# Altium PCB EsoCore_Edge.PcbDoc (part 3 of 6)
Units mil, origin at the board's own origin, x right, y up, seen from the top; angles counter-clockwise.
Board outline 6732.28 x 3385.83 mil, 4 copper layers (Top Layer, Layer 1, Layer 2, Bottom Layer), stack 61.58 mil thick; 330 components, 239 nets, 1236 pads, 712 vias.
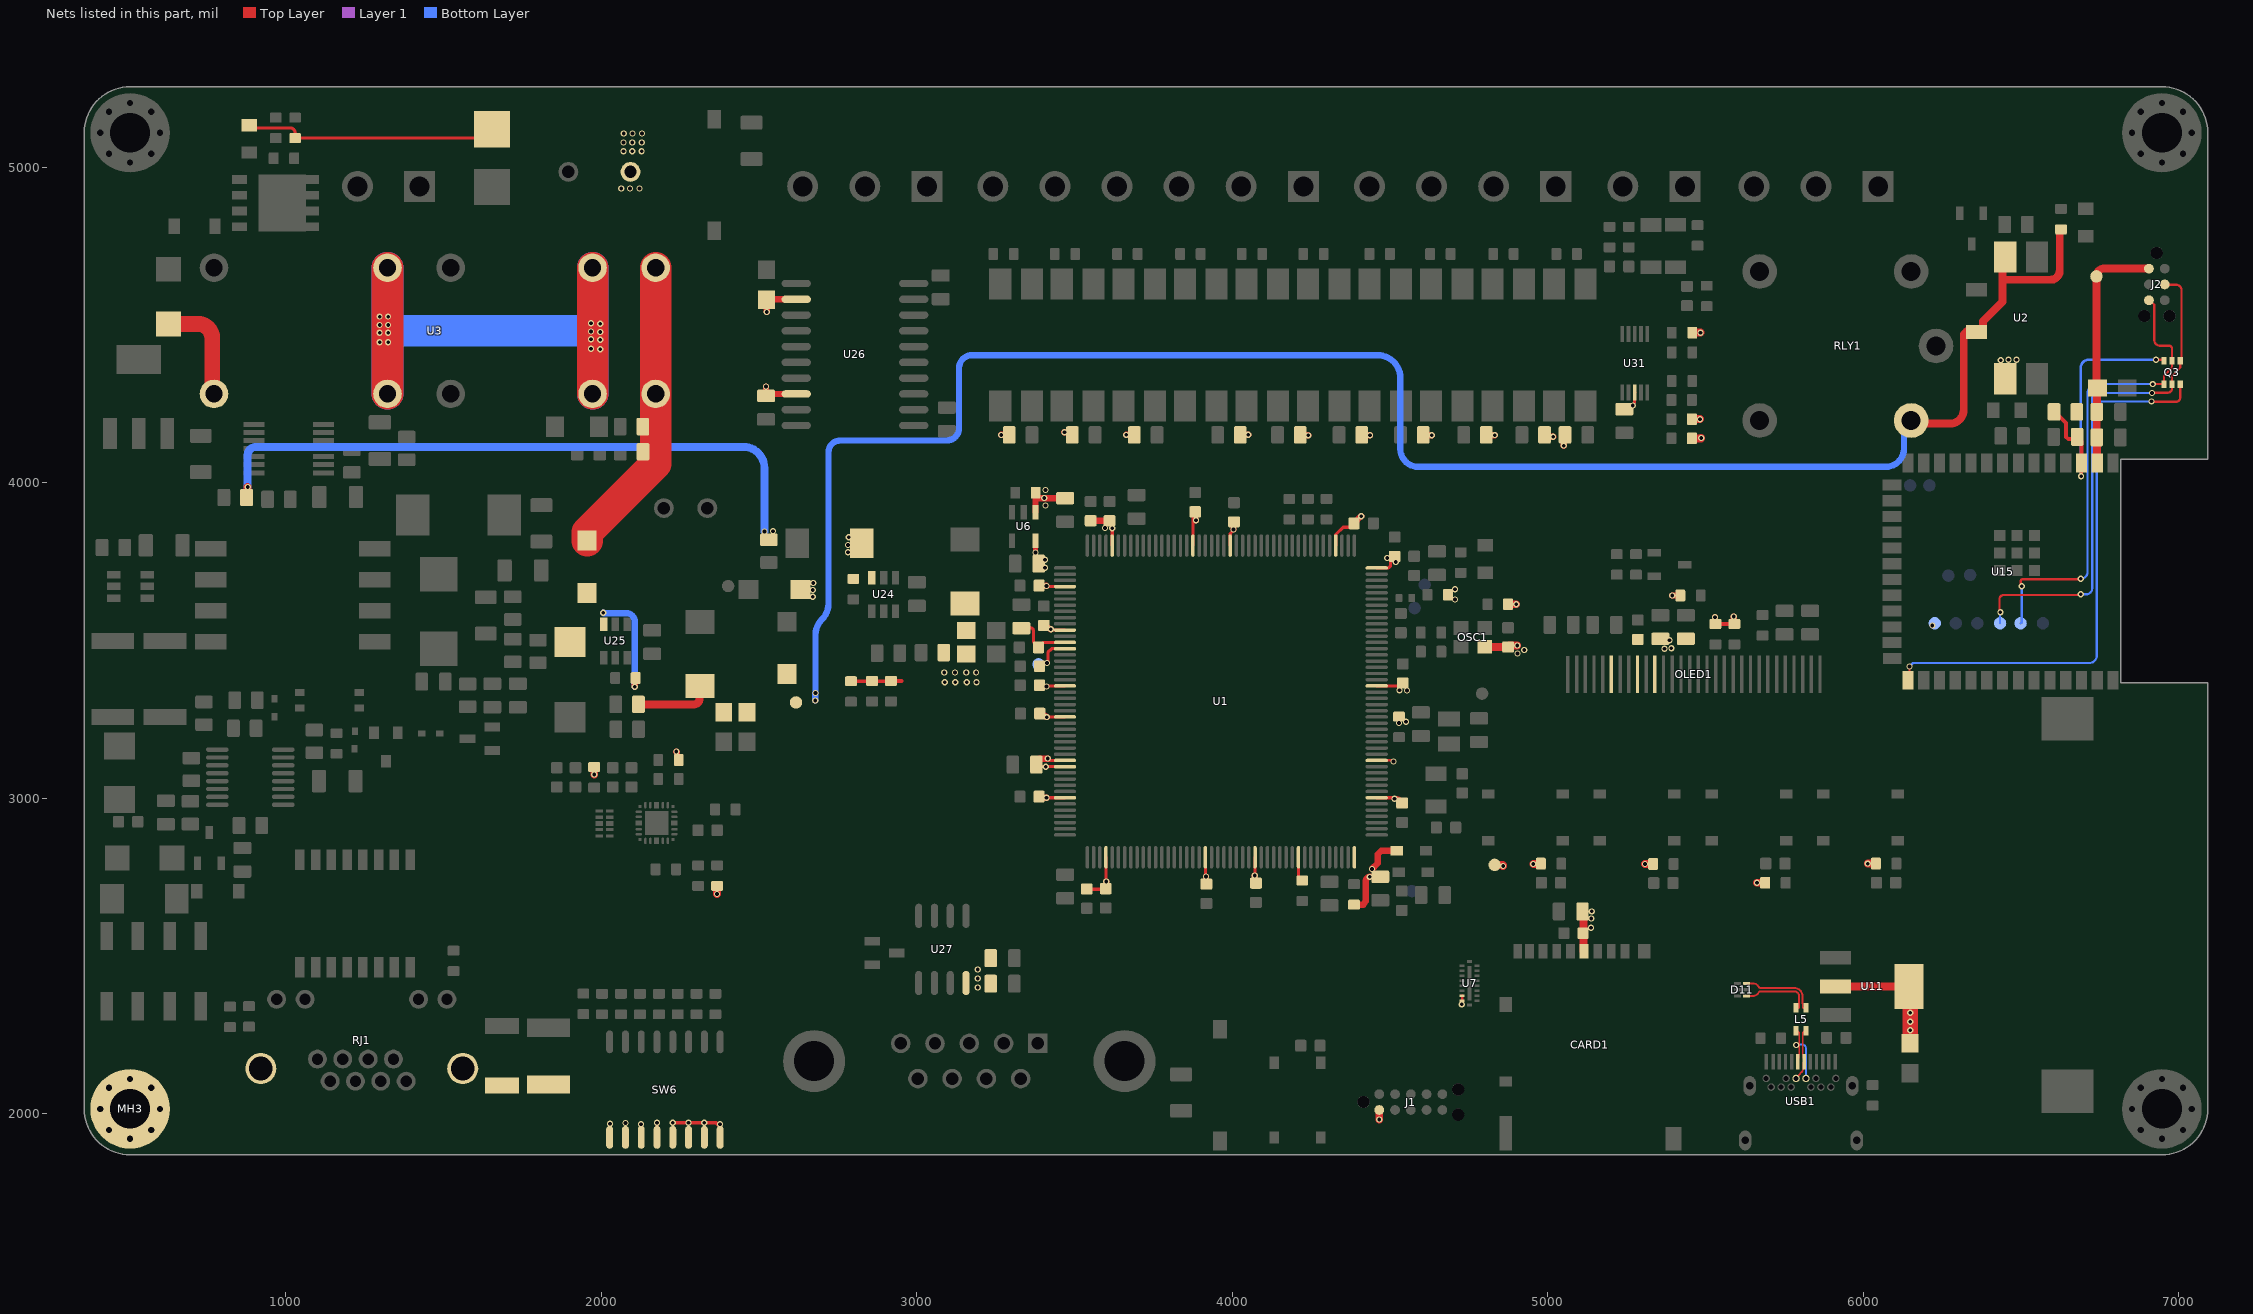
[diagram p4: the nets of this part, all layers, seen from the top]

## Part data (continued)
SW7 SW8: library part DSIC01LS-P_C600988, Color=Black, Current Rating=25mA, JLCPCB Part Class="Extended Part", LCSC Part Name="平拨,凸起式 1位拨码开关", Manufacturer="XKB Connection(中国星坤)", Operating Life="3,000 Cycles", Operating Temperature=-20℃~+70℃, Voltage Rating=24V, Add into BOM=yes, Circuit=SPST, Convert to PCB=yes, Datasheet=https://item.szlcsc.com/datasheet/DSIC01LS-P/631008.html, Device=DSIC01LS-P_C600988, Lead Pitch=-, Manufacturer Part=DSIC01LS-P, Number of Positions=1, Supplier=LCSC, Supplier Footprint=SMD,6.2x3.5mm, Supplier Part=C600988, Symbol=DSIC01LS-P_C600988, Termination Style="Gull Wing", Type="Slide, Rocked"
T2: "253ÂµH Isolation and Data Interface (Encapsulated) Pulse Transformer 1:0.125:0.208 Surface Mount", Package=None, Check_prices=https://www.snapeda.com/parts/PA1134NL/Pulse/view-part/?ref=eda, MF=Pulse, MP=PA1134NL, SnapEDA_Link=https://www.snapeda.com/parts/PA1134NL/Pulse/view-part/?ref=snap
T3: library part H1102NLT_C20623173, Inductor=-, JLCPCB Part Class="Extended Part", Manufacturer=DEXU(德旭电子), Operating Temperature=0℃~+70℃, Add into BOM=yes, Convert to PCB=yes, Datasheet=https://atta.szlcsc.com/upload/public/pdf/source/20240221/C17B427D958C9B2A67A52A591C4EE00A.pdf, Device=H1102NLT_C20623173, Function=-, HI-POT=-, LCSC Part Name=H1102NLT, Manufacturer Part=H1102NLT, port=单口, rate=10/100M, Supplier=LCSC, Supplier Footprint=SMD-16P,12.7x9.5mm, Supplier Part=C20623173, Symbol=H1102NLT_C20623173, Turns Ratio=-
U1: JLCPCB Part Class="Extended Part", LCSC Part Name="带DSP和DP-FPU的高性能ARM Cortex-M7 + Cortex-M4 MCU，具有2 MB Flash、1 MB RAM、480 MHz CPU、ART加速器、一级缓存、外部存储器接口、大量外设、SMPS和MIPI-DSI", Low Voltage Detection Threshold=1.62V~3.6V, Manufacturer=ST(意法半导体), ADC (Bit)=16bit, Add into BOM=yes, Application Area=-, Convert to PCB=yes, CPU Core="ARM other series", CPU Maximum Speed=240MHz；480MHz, DAC (Bit)=12bit, Datasheet=https://atta.szlcsc.com/upload/public/pdf/source/20200902/C730194_AB31659919554024C167BACD3EB6D7B7.pdf, Device=STM32H747IIT6, Manufacturer Part=STM32H747IIT6, Number of I/O=168, Program Memory Type=FLASH, Program Storage Size=2MB, Supplier=LCSC, Supplier Footprint=LQFP-176(24x24), Supplier Part=C730199, Symbol=STM32H747IIT6
U2 U28 U29 U30 U32 U33 U34 U35 U36 U37 U38: JLCPCB Part Class="Extended Part", Manufacturer=SHARP(夏普), Contributor=LCSC, Manufacturer Part=PC817X2NIPW, spicePre=U, spiceSymbolName=PC817X2NIPW, Supplier=LCSC, Supplier Part=C2840443
U3: Coil Resistance=-, JLCPCB Part Class="Extended Part", Manufacturer=OMRON(欧姆龙), Add into BOM=yes, Coil Type=-, Coil Voltage=-, Contact Form=-, Contact Material=-, Contact Rating=-, Contact Resistance=-, Convert to PCB=yes, Datasheet=https://item.szlcsc.com/datasheet/G7SA-2A2B%2520DC24/378713.html, Device="G7SA-2A2B DC24", LCSC Part Name="G7SA-2A2B DC24", Manufacturer Part="G7SA-2A2B DC24", Number of Pins=-, Operate Time=-, Operating Temperature=-, Release Time=-, Supplier=LCSC, Supplier Footprint=DIP,13x40mm, Supplier Part=C397126, Switching Current(Max)=-, Switching Voltage(Max)=-, Symbol="G7SA-2A2B DC24"
U4: JLCPCB Part Class="Extended Part", LCSC Part Name="330mA 15V电机驱动芯片", Manufacturer=TI(德州仪器), Add into BOM=yes, Convert to PCB=yes, Datasheet=https://www.ti.com/cn/lit/gpn/drv110, Device=DRV110APWR, Manufacturer Part=DRV110APWR, Supplier=LCSC, Supplier Footprint=TSSOP-14, Supplier Part=C2653796, Symbol=DRV110APWR
U5: library part BLM18PG121SN1D, Current Rating=2A, DC Resistance=50mΩ, Impedance @ Frequency=120Ω@100MHz, JLCPCB Part Class="Extended Part", Manufacturer=muRata(村田), Tolerance=±25%, Add into BOM=yes, Circuits=1, Convert to PCB=yes, Datasheet=https://atta.szlcsc.com/upload/public/pdf/source/20130704/1457706621134.pdf, Device=BLM18PG121SN1D, Manufacturer Part=BLM18PG121SN1D, Supplier=LCSC, Supplier Footprint=0603, Supplier Part=C14709, Symbol=BLM18PG121SN1D_C14709
U6: Dropout Voltage=380mV@(300mA), JLCPCB Part Class="Extended Part", LCSC Part Name="具有使能功能的 300mA、高 PSRR、低 IQ、低压降稳压器", Manufacturer=TI(德州仪器), Maximum Input Voltage=5.5V, Operating Temperature=-40℃~+125℃@(Tj), Output Current=300mA, Output Voltage=1.2V, Power Supply Rejection Ratio (PSRR)=68dB@(1kHz), standby current=55uA, Add into BOM=yes, Convert to PCB=yes, Datasheet=https://www.ti.com/cn/lit/gpn/tlv702, Device=TLV70212DBVR, Feature="ESD Protection；Low ESR；Thermal Protection(TSD)；Under-voltage Lockout；Overcurrent Protection(OCP)；With ability", Manufacturer Part=TLV70212DBVR, Number of Outputs=1, Output Polarity="Positive electrode", Output Type=Fixed, Supplier=LCSC, Supplier Footprint=SOT-23-5, Supplier Part=C81462, Symbol=TLV70212DBVR
U7: JLCPCB Part Class="Extended Part", Manufacturer=ST(意法半导体), Add into BOM=yes, Convert to PCB=yes, Datasheet=https://atta.szlcsc.com/upload/public/pdf/source/20230906/AB780163D3E87C06B3836FCBE42EA0F7.pdf, Device=EMIF06-MSD02N16, LCSC Part Name=EMIF06-MSD02N16, Manufacturer Part=EMIF06-MSD02N16, Supplier=LCSC, Supplier Footprint=QFN-16L, Supplier Part=C5267594, Symbol="EMIF06-MSD02N 16"
U8 U9 U10: Current - Rectified=2A, JLCPCB Part Class="Extended Part", LCSC Part Name="电压:40V 电流:2A", Manufacturer=Comchip(典琦), Non-Repetitive Peak Forward Surge Current=70A, Operating Junction Temperature Range=-55℃~+100℃, Reverse Leakage Current (Ir)=200uA@40V, Voltage - DC Reverse(Vr)=40V, Voltage - Forward(Vf@If)=310mV@2A, Add into BOM=yes, Convert to PCB=yes, Datasheet=https://item.szlcsc.com/datasheet/CDBA240LL-HF/3097132.html, Device=CDBA240LL-HF, Manufacturer Part=CDBA240LL-HF, Supplier=LCSC, Supplier Footprint=SMA(DO-214AC), Supplier Part=C2886093, Symbol=CDBA240LL-HF
U11: library part AMS1117-3.3_C6186, JLCPCB Part Class="Basic Part", LCSC Part Name="输出3.3V 1A", Manufacturer=AMS, Operating Temperature=-40℃~+125℃, Output Current=1A, Output Voltage=3.3V, Power Supply Rejection Ratio (PSRR)=72dB@(120Hz), standby current=5mA, Voltage - Supply=16V, Voltage Dropout=1.1V@(800mA), Add into BOM=yes, Convert to PCB=yes, Datasheet=https://item.szlcsc.com/datasheet/AMS1117-3.3/6652.html, Device=AMS1117-3.3_C6186, Features="Over Current Protection；Over Temperature Protection", Manufacturer Part=AMS1117-3.3, Noise=-, Number of Outputs=1, Output Configuration=Positive, Output Type=Fixed, Supplier=LCSC, Supplier Footprint=SOT-223, Supplier Part=C6186, Symbol=AMS1117-3.3
U12: Breaking Capacity=50A, Current Rating=5A, JLCPCB Part Class="Extended Part", LCSC Part Name=125V贴片式保险丝, Manufacturer=Littelfuse(美国力特), Operating Temperature=-55℃~+125℃, Voltage Rating  (AC)=125V, Add into BOM=yes, Convert to PCB=yes, Datasheet=https://atta.szlcsc.com/upload/public/pdf/source/20171201/C151124_15121178420491156381.pdf, Device=0452005.MRL, Manufacturer Part=0452005.MRL, Supplier=LCSC, Supplier Footprint=SMD,6.1x2.7mm, Supplier Part=C66503, Symbol=0452005.MRL, Type="SMD Fuse", Voltage Rating (DC)=125V
U13 U16: library part ZMM3V3_C5345987, JLCPCB Part Class="Extended Part", LCSC Part Name="独立式 耐压:3.3V 电流:2uA", Manufacturer="HXY MOSFET(华轩阳电子)", Pd - Power Dissipation=500mW, Reverse Leakage Current (Ir)=2uA, Zener Voltage(Nom)=3.3V, Zener Voltage(Range)=3.1V~3.5V, Add into BOM=yes, Convert to PCB=yes, Datasheet=https://item.szlcsc.com/datasheet/ZMM3V3/6125824.html, Device=ZMM3V3_C5345987, Diode Configuration=Independent, Impedance(Zzk)=600Ω, Impedance(Zzt)=85Ω, Manufacturer Part=ZMM3V3, Supplier=LCSC, Supplier Footprint=LL-34, Supplier Part=C5345987, Symbol=ZMM3V3_C5345987
U14: JLCPCB Part Class="Extended Part", LCSC Part Name=DP83825I低功耗10/100Mbps以太网物理层收发器, Manufacturer=TI(德州仪器), Operating Temperature=-40℃~+85℃, Voltage - Supply=1.8V；3.3V, Add into BOM=yes, Applications Function=-, Convert to PCB=yes, Datasheet=https://www.ti.com/cn/lit/gpn/dp83825i, Device=DP83825IRMQR, MAC Interface=RMII, Manufacturer Part=DP83825IRMQR, Number of Channels=-, Supplier=LCSC, Supplier Footprint=HVQFN-24-EP(3x3), Supplier Part=C783599, Symbol=DP83825IRMQR
U15: JLCPCB Part Class="Extended Part", Manufacturer=ESPRESSIF(乐鑫), Contributor=lcsc, Manufacturer Part=ESP32-S3-WROOM-1-N16R8, spicePre=U, spiceSymbolName=ESP32-S3-WROOM-1U-N16R8, Supplier=LCSC, Supplier Part=C2913202
U17: Current - Rectified=8A, JLCPCB Part Class="Extended Part", LCSC Part Name="电压:40V 电流:8A", Manufacturer=GOODWORK(固得沃克), Non-Repetitive Peak Forward Surge Current=175A, Operating Junction Temperature Range=-65℃~+150℃, Reverse Leakage Current (Ir)=100uA, Voltage - DC Reverse(Vr)=40V, Voltage - Forward(Vf@If)=550mV@8A, Add into BOM=yes, Convert to PCB=yes, Datasheet=https://item.szlcsc.com/datasheet/SS84/3328867.html, Device=SS84, Diode Configuration=Independent, Manufacturer Part=SS84, Supplier=LCSC, Supplier Footprint=SMC(DO-214AB), Supplier Part=C2943761, Symbol=SS84
U18: JLCPCB Part Class="Extended Part", Manufacturer=ADI(亚德诺), Maximum Power=12.95W, Operating Temperature=0℃~+70℃, Supply Voltage=57V, Add into BOM=yes, Convert to PCB=yes, Datasheet=https://atta.szlcsc.com/upload/public/pdf/source/20200917/C687879_7E0D40D8D4792BF56EAC4A3F32693668.pdf, Device=LTC4267CGN-3#PBF, LCSC Part Name=LTC4267CGN-3#PBF, Manufacturer Part=LTC4267CGN-3#PBF, Number of Channels=1, Supplier=LCSC, Supplier Footprint=SSOP-16-150mil, Supplier Part=C687885, Symbol=LTC4267CGN-3#PBF, Type="Power receiving device (PD)"
U19 U20: library part HoJLR2512-3W-250mR-1%, JLCPCB Part Class="Extended Part", LCSC Part Name="250mΩ ±1% 3W", Manufacturer=Milliohm(毫欧), Tolerance=±1%, Add into BOM=yes, Convert to PCB=yes, Datasheet=https://atta.szlcsc.com/upload/public/pdf/source/20211009/7525CABAB363C979E942C1DD41F1FEF0.pdf, Device=HoJLR2512-3W-250mR-1%, Manufacturer Part=HoJLR2512-3W-250mR-1%, Mounting Sytle="Surface Mount", Supplier=LCSC, Supplier Footprint=2512, Supplier Part=C2903484, Symbol=HOJLR2512-3W-250MR-1%, Type="Current Sensing Resistors"
U21: library part PS2911-1-F3-AX_C5334506, Isolation Voltage(Vrms)=2.5kV, JLCPCB Part Class="Extended Part", LCSC Part Name=四引脚超小型扁平引脚封装光电耦合器, Manufacturer=RENESAS(瑞萨)/IDT, Operating Temperature=-55℃~+100℃, Output Current=40mA, Voltage - Forward(Vf)=1.1V, Add into BOM=yes, Convert to PCB=yes, Datasheet=https://item.szlcsc.com/datasheet/PS2911-1-F3-AX/6098733.html, Device=PS2911-1-F3-AX_C5334506, Fall time=10us, Manufacturer Part=PS2911-1-F3-AX, Number of Outputs=1, Rise time=5us, Supplier=LCSC, Supplier Footprint=SOP-4, Supplier Part=C5334506, Symbol=PS2911-1-F3-AX_C5334506
U22: JLCPCB Part Class="Extended Part", LCSC Part Name="TLV431x 低电压可调精密分流稳压器", Manufacturer=TI(德州仪器), Minimum Cathode Current for Regulation=80uA, Operating Temperature=-40℃~+125℃, Output Current=15mA, Output Voltage=1.24V~6V, Quiescent Current=-, Tolerance=±0.5%, Add into BOM=yes, Convert to PCB=yes, Datasheet=https://www.ti.com/cn/lit/gpn/tlv431b, Device=TLV431BQDBZR, Manufacturer Part=TLV431BQDBZR, Output Type=Adjustable, Reference Type=Parallel, Supplier=LCSC, Supplier Footprint=SOT-23-3, Supplier Part=C398374, Symbol=TLV431BQDBZR, Temperature Coefficient=-, Voltage - Supply=-
U24 U25: Frequency - Switching=500kHz, JLCPCB Part Class="Extended Part", Manufacturer=TI(德州仪器), Operating Temperature=-40℃~+150℃@(TJ), Output Current=3A, Output Voltage=600mV~34.2V, Quiescent Current=-, Voltage - Supply=4.5V~36V, Add into BOM=yes, Convert to PCB=yes, Datasheet=https://item.szlcsc.com/datasheet/LMR51430XDDCR/5856347.html, Device=LMR51430XDDCR, Function=Buck, LCSC Part Name=LMR51430XDDCR, Manufacturer Part=LMR51430XDDCR, Number of Outputs=1, Output Type=Adjustable, Supplier=LCSC, Supplier Footprint=SOT-23-6, Supplier Part=C5185863, Switch tube (built-in/external)=Built-In, Symbol=LMR51430XDDCR, Synchronous Rectifier=Yes, Topology=Buck
U26: Isolation Voltage(Vrms)=2500, JLCPCB Part Class="Extended Part", LCSC Part Name="信号和电源隔离的RS-485收发器，具有±15 kV静电放电保护", Manufacturer=ADI(亚德诺), Operating Temperature=-40℃~+85℃, Output Voltage=3.3V, Voltage - Supply=3.3V；5V, Add into BOM=yes, CMTI(kV/us)=25kV/us, Communication Mode=Full-Duplex；Half-Duplex, Convert to PCB=yes, Datasheet=https://item.szlcsc.com/datasheet/ADM2582EBRWZ/19232.html, Device=ADM2582EBRWZ, Manufacturer Part=ADM2582EBRWZ, Supplier=LCSC, Supplier Footprint=SOIC-20-300mil, Supplier Part=C18532, Symbol=ADM2582EBRWZ
U27: JLCPCB Part Class="Extended Part", LCSC Part Name="SN65HVD1176, SN75HVD1176 PROFIBUS RS-485 收发器", Manufacturer=TI(德州仪器), Operating Temperature=-40℃~+85℃, Voltage - Supply=4.75V~5.25V, Add into BOM=yes, Convert to PCB=yes, Data Rate=40Mbps, Datasheet=https://www.ti.com/cn/lit/gpn/sn65hvd1176, Device=SN65HVD1176DR, Manufacturer Part=SN65HVD1176DR, Number of Drivers=1, Number of Receivers=1, Supplier=LCSC, Supplier Footprint=SOIC-8, Supplier Part=C123783, Symbol=SN65HVD1176DR, Type=transceiver
U31: JLCPCB Part Class="Extended Part", Manufacturer=TI(德州仪器), Contributor=LCSC, Manufacturer Part=ADS1115IDGST, spicePre=U, spiceSymbolName=ADS1115IDGST, Supplier=LCSC, Supplier Part=C468683
UR1 UR2: Current - Rectified=800mA, JLCPCB Part Class="Extended Part", LCSC Part Name="耐压:100V 电流:0.8A", Manufacturer=DIODES(美台), Non-Repetitive Peak Forward Surge Current=30A, Operating Junction Temperature Range=-55℃~+150℃, Reverse Leakage Current (Ir)=5uA@100V, Voltage - DC Reverse(Vr)=100V, Voltage - Forward(Vf@If)=1V@400mA, Add into BOM=yes, Convert to PCB=yes, Datasheet=https://item.szlcsc.com/datasheet/HD01-T/53165.html, Device=HD01-T, Manufacturer Part=HD01-T, Supplier=LCSC, Supplier Footprint=MBS, Supplier Part=C52151, Symbol=HD01-T
USB1: Current Rating-Power=3A, Detection color=Black, JLCPCB Part Class="Extended Part", LCSC Part Name="Type-C 母 卧贴", Manufacturer="SHOU HAN(首韩)", Operating Temperature=-40℃~+85℃, Voltage Rating=30V, Add into BOM=yes, Connect-Disconnect Life="10,000 Cycles", Connector Type=Type-C, Convert to PCB=yes, Datasheet=https://item.szlcsc.com/datasheet/TYPE-C%252024P%2520QCHT/458820.html, Device="TYPE-C 24P QCHT", Gender=Female, Manufacturer Part="TYPE-C 24P QCHT", Mounting Type="Surface Mount, Right Angle", Number of Contacts=24P, Number of Ports=1, Protocol Standard="USB 3.1", Supplier=LCSC, Supplier Footprint=SMD, Supplier Part=C456013, Symbol="TYPE-C 24P QCHT"
X3: library part ABS07-32.768KHZ-T, Equivalent Series Resistance(ESR)=70kΩ, Frequency Stability=-, JLCPCB Part Class="Extended Part", LCSC Part Name="32.768kHz ±20ppm 12.5pF", Load Capacitance=12.5pF, Manufacturer=ABRACON, Normal temperature Frequency Tolerance=±20ppm, Operating Temperature=-40℃~+85℃, Add into BOM=yes, Convert to PCB=yes, Datasheet=https://item.szlcsc.com/datasheet/ABS07-32.768KHZ-T/141540.html, Device=ABS07-32.768KHZ-T, Manufacturer Part=ABS07-32.768KHZ-T, Supplier=LCSC, Supplier Footprint=SMD3215-2P, Supplier Part=C130253, Symbol=ABS07-32.768KHZ-T, Type="Crystal Oscillator"

## Via types
v1: diameter 19.68, hole 11.81, Top Layer to Bottom Layer, tented both sides, 712 vias

## Nets (pads, with @x,y where several pads share a name; then routed paths per layer and width w, separated by ;. In a path a pad name is that pad's centre, name@x,y a point inside that pad or via, vN(x,y) a via of type N, cw(c..) or ccw(c..) an arc to the next point about the centre after c; other vN are vias at no path point)
1V2: 1V2_.1 C39.2 C101.1 C102.1 U1.102 U1.108 U6.5 | length 254
  Top Layer w10: C101.1@3388.77,3358.52 3390.95,3356.34 3409.48,3356.34 v1(3411.33,3354.49) 3413.15,3356.3 U1.108@3469.75,3356.3 ; v1(3412.52,3429.18) 3412.52,3431.8 3415.48,3434.76 3415.48,3462.48 3427.41,3474.41 U1.102@3469.75,3474.41
  Top Layer w15: U6.5@3376.4,3816.58 v1(3376.4,3779.39) 3377.3,3778.5 3377.3,3752.89 C39.2@3386.38,3743.81
  other v1: 3406.28,3730.99 3406,3756
3V3: 3v3_OUT_.1 C2.1 C4.1 C5.1 C6.1 C7.1 C8.1 C9.1 C10.1 C11.2 C13.2 C14.1 C17.1 C18.1 C19.1 C20.1 C21.1 C26.2 C31.1 C32.1 C33.1 C34.1 C35.1 C57.1 C58.2 C59.2 C60.2 C62.1 C63.2 C85.1 C86.1 C91.1 C92.2 C95.2 C96.2 C97.2 C103.2 CARD1.4 D4.2 J1.1 J2.1 L2.2 L4.2 L7.2 OLED1.6 OLED1.9 OLED1.11 OSC1.4 R5.1 R6.1 R7.1 R11.2 R13.1 R15.2 R20.1 R21.1 R24.1 R25.1 R27.2 R28.2 R29.2 R37.1 R63.2 R77.2 R80.2 R81.2 R82.2 R83.2 R84.2 R91.2 R92.2 R98.2 R99.2 R102.2 R103.2 R105.2 R109.2 R112.2 R113.1 R115.1 SW6.1 SW6.2 SW6.3 SW6.4 SW6.5 SW6.6 SW6.7 SW6.8 TP1.1 U1.7 U1.13 U1.25 U1.44 U1.48 U1.65 U1.71 U1.84 U1.92 U1.99 U1.113 U1.120 U1.121 U1.126 U1.136 U1.152 U1.160 U1.176 U2.1 U5.2 U6.1 U7.16 U7.17 U8.2 U11.2 U11.4 U15.2 U26.2 U26.8 U27.8 U31.8 VDD_MCU_.1 | length 7193.4
  Top Layer w8: U1.13@4457.93,3120.08 4507.92,3120.08 cw(c4507.92,3117) v1(4511,3117) ; v1(4727.54,2346.8) 4728.63,2346.8 U7.17@4728.63,2358.69 U7.16@4728.63,2374.44
  Top Layer w10: SW6.4@2176.38,1925.24 v1(2176.38,1971.7) ; C34.1@3387.77,3674.52 3388.59,3673.69 3399.39,3673.69 v1@3410.19,3673.69 ; v1(3411.02,3672.86) 3412.63,3671.26 U1.92@3469.75,3671.26 ; v1@3411.33,3001.97 U1.126@3469.75,3001.97 ; C35.1@3411.76,3535.23 3424.23,3535.23 v1(3425,3536) 3426.85,3534.15 3434.98,3534.15 3435.46,3533.67 3469.55,3533.67 U1.99@3469.75,3533.47 ; v1(3411.88,3257.38) 3411.88,3257.88 U1.113@3469.75,3257.88 ; U1.121@3469.75,3100.4 v1(3408.53,3100.4) 3379,3100.4 C11.2@3379,3107 3379,3120.08 U1.120@3469.75,3120.08 ; v1@3599.67,2736.06 U1.136@3599.67,2813 ; C4.1@3611,3880 C4.1@3621,3870 ; U1.84@3619.35,3801.18 C4.1@3619.35,3870 ; U1.71@3875.26,3801.18 3875.26,3888.85 cw(c3882.52,3888.85) C9.1@3882.52,3896.11 ; v1@3875.85,3883.99 3875.85,3901.56 C9.1@3882.52,3908.23 ; v1@3914.63,2751.83 U1.152@3914.63,2813 ; U1.65@3993.37,3801.18 3993.57,3801.38 3993.57,3839.38 4003.99,3849.81 v1(4003.99,3852.43) ; C19.1@4072.11,2732.01 4072.11,2721.89 ccw(c4075,2721.89) C19.1@4075,2719 ; v1@4072.11,2755.06 U1.160@4072.11,2813 ; U1.48@4328.01,3801.18 4328.21,3801.38 4328.21,3836.37 4351.27,3859.43 4374.19,3859.43 C17.1@4386.23,3871.48 ; U1.7@4457.93,3001.97 4521.27,3001.97 cw(c4521.27,2984.77) C6.1@4538.48,2984.77 ; U1.25@4457.93,3356.3 4458.13,3356.5 4531.78,3356.5 C20.1@4540.52,3365.23 ; U1.44@4457.93,3730.32 4458.13,3730.52 4495.83,3730.52 4502,3736.69 4502,3754.28 4514.72,3767 C18.1@4515,3767 ; C97.2@5243.19,4233.38 5256.55,4246.73 5271.73,4246.73 5271.73,4249.35 5275.09,4252.71 5275.09,4285.57 U31.8@5275.99,4286.48 ; C97.2@5254.81,4245 v1(5270,4245) ; C7.1@3914.63,2731.39 ccw(c3918,2731.39) C7.1@3918,2728.02 cw(c3918,2731.39) C7.1@3914.63,2731.39
  Top Layer w12: v1(2226.38,1971.7) 2363.43,1971.7 2374.46,1960.67 2374.46,1954.28 SW6.8@2376.38,1952.36 ; SW6.8@2376.16,1952.58 2376.16,1963.47 2376.38,1963.7 v1@2376.38,1967.47 ; SW6.8@2376.38,1925.24 SW6.8@2376.38,1947.72 ; R7.1@2791.26,3371.23 2917.27,3371.23 ccw(c2917.27,3371.96) R6.1@2918,3371.96 2950.96,3371.96 ccw(c2950.96,3373) 2952,3373 ; C32.1@3526.05,2714.6 C32.1@3537.75,2712.51 ; C32.1@3538.75,2712.51 3551.45,2711.59 3586.05,2711.59 C31.1@3598.75,2712.67 ; R27.2@5531.74,3552.73 R28.2@5591.74,3552.73
  Top Layer w20: v1(2237.72,3148.11) 2239.48,3146.34 2239.48,3127.51 R15.2@2245.23,3121.76 ; v1(2522,4305.53) C92.2@2522,4276 cw(c2528,4276) 2528,4282 U26.8@2617.78,4282 ; v1(2524,4542) 2524,4580 C91.1@2523,4581 cw(c2524,4581) 2524,4582 U26.2@2617.78,4582 ; v1(3267.47,4152.13) R105.2@3293.15,4152.09 R105.2@3293.15,4152.09 ; U6.1@3376.4,3907.42 3376.4,3954 3379.02,3951.38 C26.2@3470.19,3951.38 ; C11.2@3379,3107 3388.69,3125.54 v1(3415,3126) ; C8.1@3387.77,3005.52 ccw(c3391.57,3005.52) 3391.57,3001.72 v1(3411.33,3001.72) ; C34.1@3387.77,3674.52 3399.39,3673.69 v1(3411.02,3672.86) v1@3410.19,3673.69 ; C33.1@3389.77,3268.52 v1@3411.88,3257.88 ; C35.1@3402.52,3548.23 v1(3425,3536) ; v1(3467.81,4160.4) 3484.84,4160.4 R103.2@3493.15,4152.09 ; C5.1@3551,3880 C4.1@3611,3880 ; C31.1@3598.75,2712.67 ccw(c3598.75,2714.52) 3600.6,2714.52 v1(3600.6,2736.06) ; v1(3663.76,4152.21) 3689.45,4152.21 R99.2@3689.57,4152.09 ; C9.1@3882.52,3908.23 3882.52,3896.11 3882.52,3883.99 ccw(c3884.9,3883.99) v1(3884.9,3881.62) ; C7.1@3914.63,2731.39 ccw(c3914.63,2733.57) 3916.8,2733.57 v1(3916.8,2751.83) ; v1(4003.99,3852.43) 4003.99,3874.71 cw(c4005.52,3874.71) C10.1@4005.52,3876.23 ; R92.2@4025.43,4152.09 4025.65,4152.31 v1(4050.79,4152.31) ; v1(4071.08,2755.06) 4071.08,2733.04 ccw(c4072.11,2733.04) C19.1@4072.11,2732.01 ; R80.2@4215.43,4152.09 4216.88,4150.64 v1(4241.01,4150.64) ; R113.1@4385.74,2662.77 4415.77,2662.77 4421.67,2671.98 ccw(c4404.83,2682.77) 4423.63,2675.96 4423.63,2738.63 cw(c4436,2738.63) v1(4436,2751) ; C17.1@4386.23,3871.48 4386.23,3872.46 4407.77,3894 v1(4409,3894) ; R77.2@4410.43,4152.09 4411.6,4150.92 v1(4436.8,4150.92) ; v1(4443,2776) 4461,2794 4461,2822.28 4472.72,2834 D4.2@4521.84,2834 ; R102.2@4605.43,4152.09 4606.49,4151.03 v1(4632.54,4151.03) ; R98.2@4805.43,4152.09 4806.2,4151.32 v1(4831.79,4151.32) ; R91.2@4990,4152.09 4995.74,4146.35 v1(5017.17,4146.35) ; v1(5050.75,4118.08) 5050.75,4147.84 R81.2@5055,4152.09 ; v1(5394.48,3642.74) R11.2@5420.27,3642.74 ; v1(5530.43,3573.98) 5530.43,3554.04 R27.2@5531.74,3552.73 ; v1(5589.55,3576.06) 5589.55,3554.92 R28.2@5591.74,3552.73
  Top Layer w25: R112.2@875.21,3953.67 878.78,3957.24 v1(878.78,3986.77) ; L4.2@1977,3098.9 1977.26,3098.64 v1(1977.26,3075.17) ; v1(2366.74,2696.48) R13.1@2366.74,2722.27 ; v1(4466,1982) J1.1@4466,2012 ; OSC1.4@4800.4,3480.77 ccw(c4802.66,3483.03) 4802.66,3479.83 C14.1@4874.42,3479.83 4879.39,3484.8 v1(4903.4,3484.8) ; VDD_MCU_.1@4832,2789 4855.17,2789 cw(c4855.17,2785.49) v1(4858.69,2785.49) ; R37.1@4874.2,3615.3 v1(4899.99,3615.3) ; v1(4954.42,2791.78) 4978.04,2791.78 R20.1@4978.04,2793 ; C63.2@5110.4,2641.58 5113.69,2638.29 5113.69,2574.04 C62.1@5112.17,2572.52 5114.01,2570.69 5114.01,2516.52 CARD1.4@5115.28,2515.24 ; v1(5308.48,2792) R21.1@5334.27,2792 ; R83.2@5457.23,4141.26 5485.69,4141.26 ccw(c5485.69,4142.14) v1(5486.56,4142.14) ; R82.2@5457.23,4202 v1(5483.02,4202) ; R84.2@5458.23,4476.14 v1(5484.02,4476.14) ; v1(5663.48,2732.22) R24.1@5689.27,2732.22 ; U11.2@5912,2403.55 U11.4@6145.85,2403.55 ; v1(6014.48,2793) R25.1@6040.27,2793 ; U15.2@6742,4063 6742,4064 6741.81,4064.19 6741.81,4143 C59.2@6740.62,4144.19 C60.2@6740.62,4225.19 6740.62,4234.05 6741.69,4235.12 6741.69,4299.93 C21.1@6742.76,4301 6739.54,4304.22 3v3_OUT_.1@6739.54,4654.54 cw(c6765,4654.54) 6765,4680 6905,4680 cw(c6905,4679) J2.1@6906,4679
  Top Layer w50: U11.4@6145.85,2403.55 cw(c6145.85,2400.41) 6149,2400.41 C2.1@6149,2223.24
  Bottom Layer w25: v1(878.78,3986.77) 878.78,4087.78 cw(c905.3,4087.78) 905.3,4114.3 2449.7,4114.3 cw(c2449.7,4047) 2517,4047 v1(2517,3846)
  other v1: 2125.4,1966.9 2375.93,1967.02 2027.52,1968.1 2076.7,1970.49 2276.38,1971.7 2326.38,1971.7 6149,2265 6149,2292 6149,2320 3193,2400 3193,2429 3193,2457 5137.34,2589.81 5137.94,2619.04 5139.93,2641.58 4514.24,2998.59 4528.51,3238.45 4551,3243 4554,3342 4530.33,3342.79 3088.58,3368 3122,3368 3158.3,3368 3189.3,3368 3087.28,3398.88 3120.7,3398.88 3157,3398.88 3188,3398.88 4904.27,3459.11 4925.77,3470.37 5370,3474 5392,3476 5386,3501 6219.42,3547.81 4706,3630 2670.36,3638.75 2669.99,3660.7 4706,3663 2671.36,3682.75 4518,3749 4491,3762 2544,3847 3619.71,3856.01 3596.7,3856.96 3407.66,3927.99 3404.07,3952.37 3408,3977.28 6436,4389 6461,4390 6486,4390
+5V_OUT: 5V_OUT_.1 C89.1 C90.1 D18.1 L8.2 R43.2 R66.2 RLY1.4 U2.4 U10.2 | length 6236
  Top Layer w25: R66.2@2117.43,3297.9 2293.9,3297.9 ccw(c2293.9,3315) 2311,3315 2311,3354.5 cw(c2313,3354.5) L8.2@2313,3356.5 ; RLY1.4@6122.79,4196.78 6131.79,4187.78 6275,4187.78 ccw(c6275,4231.78) 6319,4231.78 6319,4470.92 6328.15,4480.07 D18.1@6336,4480.07 ; D18.1@6352,4484.26 6377,4484.26 6379.96,4487.22 6379.96,4512.22 6442,4574.26 6442,4643.8 ; U2.4@6451,4715.91 6442,4706.91 6442,4643.8 ; R43.2@6627.2,4803.32 ccw(c6627.2,4799.52) 6623.4,4799.52 6623.4,4673.6 cw(c6593.6,4673.6) 6593.6,4643.8 6442,4643.8
  Bottom Layer w20: v1(2678.2,3310.17) 2678.2,3333.2 v1(2679,3334) 2679,3518.01 cw(c2748.99,3518.01) 2699.5,3567.5 ccw(c2650.01,3616.99) 2720,3616.99 2720,4097 cw(c2757.47,4097) 2757.47,4134.47 3095,4134.47 ccw(c3095,4173.47) 3134,4173.47 3134,4364 cw(c3175,4364) 3175,4405 4460,4405 cw(c4460,4332) 4533,4332 4533,4107 ccw(c4589,4107) 4589,4051 6072,4051 ccw(c6072,4108.26) 6129.26,4108.26 6129.26,4190.31 RLY1.4@6122.79,4196.78
+24v: C64.1 D1.1 LED3.1 R1.1 R3.1 R39.2 U3.0 U3.34 U3.44 U9.1 U12.2 | length 2110.9
  Top Layer w10: LED3.1@883.3,5133.91 ccw(c891.97,5133.91) 891.97,5125.25 1013.12,5125.25 cw(c1013.12,5109.01) 1029.36,5109.01 R39.2@1029.36,5092.77 ; R39.2@1029.36,5092.77 1624.8,5092.8 U12.2@1653,5121
  Top Layer w50: D1.1@628,4504 720.8,4504 cw(c720.8,4458.1) 766.7,4458.1 766.7,4287.3 ccw(c772,4287.3) U3.0@772,4282
  Top Layer w100: U9.1@1955,3816.82 1955,3844 2172,4061 U3.34@2172,4282 U3.44@2172,4682
  other v1: 2062.97,4933 2090.9,4933 2120.53,4933 2070.07,5051.3 2098,5051.3 2127.63,5051.3 2070.17,5079.1 2098.1,5079.1 2127.73,5079.1 2071.07,5107.4 2099,5107.4 2128.63,5107.4
+VIN: C84.1 R62.2 U3.11 U3.21 U3.33 U3.43 U24.3 | length 2254
  Top Layer w100: U3.11@1322,4282 U3.21@1322,4682 ; U3.33@1972,4282 U3.43@1972,4682
  Bottom Layer w100: U3.11@1322,4282 v1@1322,4482 ; U3.21@1322,4682 v1@1322,4482 ; U3.33@1972,4282 1972,4489 ; U3.43@1972,4682 1972,4489 ; v1@1322,4482 1965,4482 ccw(c1965,4489) 1972,4489
  other v1: 2781.54,3780.13 2781.72,3803.26 2784.36,3827.75 1996.68,4423.49 1967,4425 1297,4446 1324,4446 1996.68,4453.49 1967,4455 1297,4476 1324,4476 1996.68,4478.2 1967,4479.71 1297,4500.71 1324,4500.71 1996.68,4504.49 1967,4506 1297,4527 1324,4527
+VIN2: C15.1 R65.2 U9.2 U25.3 | length 350.8
  Top Layer w20: v1(2106,3354) 2106,3378.53 cw(c2108.73,3378.53) R65.2@2108.73,3381.26
  Bottom Layer w20: v1(2006,3588) ccw(c2007,3588) 2007,3587 2079,3587 cw(c2079,3560) 2106,3560 v1(2106,3354)
AT_DTR: J2.4 Q3.2 Q3.4 TP4.1 | length 1657.8
  Top Layer w7: v1(6435,3590) 6432,3590 6432,3631 cw(c6445.66,3631) 6445.66,3644.66 6687.66,3644.66 v1(6690,3647) ; v1(6916,4285) 6916,4286 6965.91,4286 ccw(c6965.91,4299.5) 6979.41,4299.5 Q3.2@6979.41,4313 6979.41,4339.99 7004.91,4365.49 7004.91,4387.71 Q3.4@7005,4387.8 7005,4389.4 7009,4389.4 7009,4611 ccw(c6992,4611) 6992,4628 6956,4628 J2.4@6956,4629
  Bottom Layer w7: TP4.1@6434,3555 6434,3589 cw(c6435,3589) v1(6435,3590) ; v1(6690,3647) 6708,3647 ccw(c6708,3665) 6726,3665 6726,4269.31 cw(c6741.69,4269.31) 6741.69,4285 v1(6916,4285)
AT_RST: J2.5 Q3.1 Q3.5 TP5.1 | length 1521.7
  Top Layer w7: v1(6503,3672) cw(c6503,3675.35) 6499.65,3675.35 6499.65,3688.84 cw(c6505.04,3688.84) 6505.04,3694.23 6688.23,3694.23 v1(6690,3696) ; J2.5@6906,4579 6909.04,4579 6923,4565.04 6923,4452 ccw(c6940,4452) 6940,4435 6968.69,4435 cw(c6968.69,4424.28) 6979.41,4424.28 Q3.5@6979.41,4387.8 6979.32,4387.71 6979.32,4365.49 6953.82,4339.99 Q3.1@6953.82,4313 v1(6918,4313)
  Bottom Layer w7: TP5.1@6499,3555 ccw(c6499,3559) 6503,3559 v1(6503,3672) ; v1(6690,3696) ccw(c6690,3717.34) 6711.34,3717.34 6711.34,4284.81 cw(c6739.54,4284.81) 6739.54,4313 v1(6918,4313)
BOOT: Q3.3 U15.27 | length 1772
  Top Layer w7: U15.27@6142,3374.02 6147,3379.02 v1(6147,3418) ; v1(6914,4258.39) 6914,4257 6992,4257 ccw(c6992,4270) 7005,4270 Q3.3@7005,4313
  Layer 1 w7: v1(6914,4258.39) v1@6914,4259
  Bottom Layer w7: v1(6147,3418) 6158,3429 6717,3429 ccw(c6717,3452.62) 6740.62,3452.62 6740.62,4239.01 cw(c6760,4239.01) 6760,4258.39 v1(6914,4258.39)
BOOT0: R114.2 U1.167 | length 80
  Top Layer w10: U1.167@4209.9,2813 4209.9,2751.57 ccw(c4221.74,2751.57) R114.2@4221.74,2739.73
D1_N: D11.3 L5.3 | length 245
  Top Layer w5.86: D11.3@5630.19,2412.94 5630.27,2413.02 5635.6,2413.02 5637.6,2413.02 5651.19,2413.02 cw(c5651.19,2393.25) 5665.17,2407.24 ; 5665.18,2407.22 cw(c5651.19,2393.25) 5667.61,2404.27 cw(c5651.19,2393.25) 5668.94,2401.96 ccw(c5674.2,2404.54) 5673.25,2398.75 ccw(c5674.2,2404.54) 5674.2,2398.68 cw(c5674.2,2381.96) 5674.33,2398.68 5674.5,2398.68 ; 5674.54,2398.68 5782,2398.68 cw(c5782,2372.81) 5807.86,2372.81 5807.86,2349.5 5808.38,2349.5 5808.38,2338.64 ccw(c5811.33,2338.64) 5811.33,2335.68 L5.3@5818.94,2335.68
D1_P: D11.1 L5.2 | length 227.4
  Top Layer w5.86: D11.1@5630.19,2373.57 5630.28,2373.47 5651.19,2373.47 ccw(c5651.19,2393.25) 5665.17,2379.26 ; 5665.18,2379.27 ccw(c5651.19,2393.25) 5668.94,2384.54 cw(c5674.2,2381.96) 5672.44,2387.54 cw(c5674.2,2381.96) 5674.05,2387.81 cw(c5674.2,2381.96) 5674.2,2387.82 ; 5674.28,2387.82 5674.41,2387.81 ccw(c5674.54,2404.54) 5674.54,2387.81 5782,2387.81 cw(c5782,2372.81) 5797,2372.81 5797,2338.64 5797.52,2338.64 cw(c5794.56,2338.64) 5794.56,2335.68 L5.2@5787.46,2335.68
D_N: L5.4 USB1.A7 USB1.B7 | length 166.2
  Top Layer w5.86: USB1.B7@5787.2,2112 5805.92,2132.95 ccw(c5798.51,2139.56) 5807.77,2135.97 5810.31,2142.49 5811.09,2148.8 5811.09,2162.47 USB1.A7@5812.79,2164.17 5810.31,2185.85 5808.65,2191.08 cw(c5814.24,2192.85) 5808.37,2192.85 ; 5808.37,2192.89 5808.37,2252.29 cw(c5818.94,2252.29) L5.4@5818.94,2262.86
D_P: L5.1 USB1.A6 USB1.B6 | length 238.5
  Top Layer w5.86: L5.1@5787.46,2262.86 cw(c5787.46,2252.81) 5797.51,2252.81 5797.51,2217.86 5797.51,2192.85 cw(c5791.65,2192.85) 5797.24,2191.08 5795.58,2185.85 USB1.A6@5793.1,2164.17
  Bottom Layer w5.86: v1(5787.94,2217.86) 5789.44,2219.35 5806.99,2219.35 cw(c5806.99,2207.64) 5818.7,2207.64 USB1.B6@5818.7,2112
DSI_VDD12: C37.1 C38.2 U1.101 | length 194.4
  Top Layer w10: C38.2@3331.54,3539.45 3333.09,3541 3359,3541 cw(c3359,3530) 3370,3530 3370,3495.27 C37.1@3385.77,3479.5 ; U1.101@3469.75,3494.1 3400.36,3494.1 3386.27,3480.01 C37.1@3385.77,3479.5 ; C37.1@3385.77,3479.5 C37.1@3385.77,3478.52 C37.1@3385.77,3479.5
EARTH_GND: C107.1 MH3.1 R35.2 RJ1.13 RJ1.14
ESP32_RTS: C61.2 Q3.6 R29.1 U15.3 | length 894.4
  Top Layer w8: v1(6928,4390) 6953.82,4390 Q3.6@6953.82,4387.8
  Top Layer w12: R29.1@6605.15,4225 6605.15,4223.33 6606.86,4221.62 6611.26,4221.62 6642.94,4189.95 6642.94,4181.83 6643.26,4181.51 6643.26,4145.84 6650.29,4138.81 6671.8,4138.81 C61.2@6678.64,4145.65 6692,4132.29 U15.3@6692,4063 6691.5,4062.5 6691.5,4021.5 v1(6691,4021)
  Bottom Layer w8: v1(6691,4021) 6690,4022 6690,4366 cw(c6714,4366) 6714,4390 v1(6928,4390)